# Altium PCB Sensor_PCB.PcbDoc
Units mm, origin at the board's own origin, x right, y up, seen from the top; angles counter-clockwise.
Board outline 46.6 x 38.61 mm, 2 copper layers (Top Layer, Bottom Layer), stack 1.671 mm thick; 10 components, 7 nets, 33 pads, 0 vias.
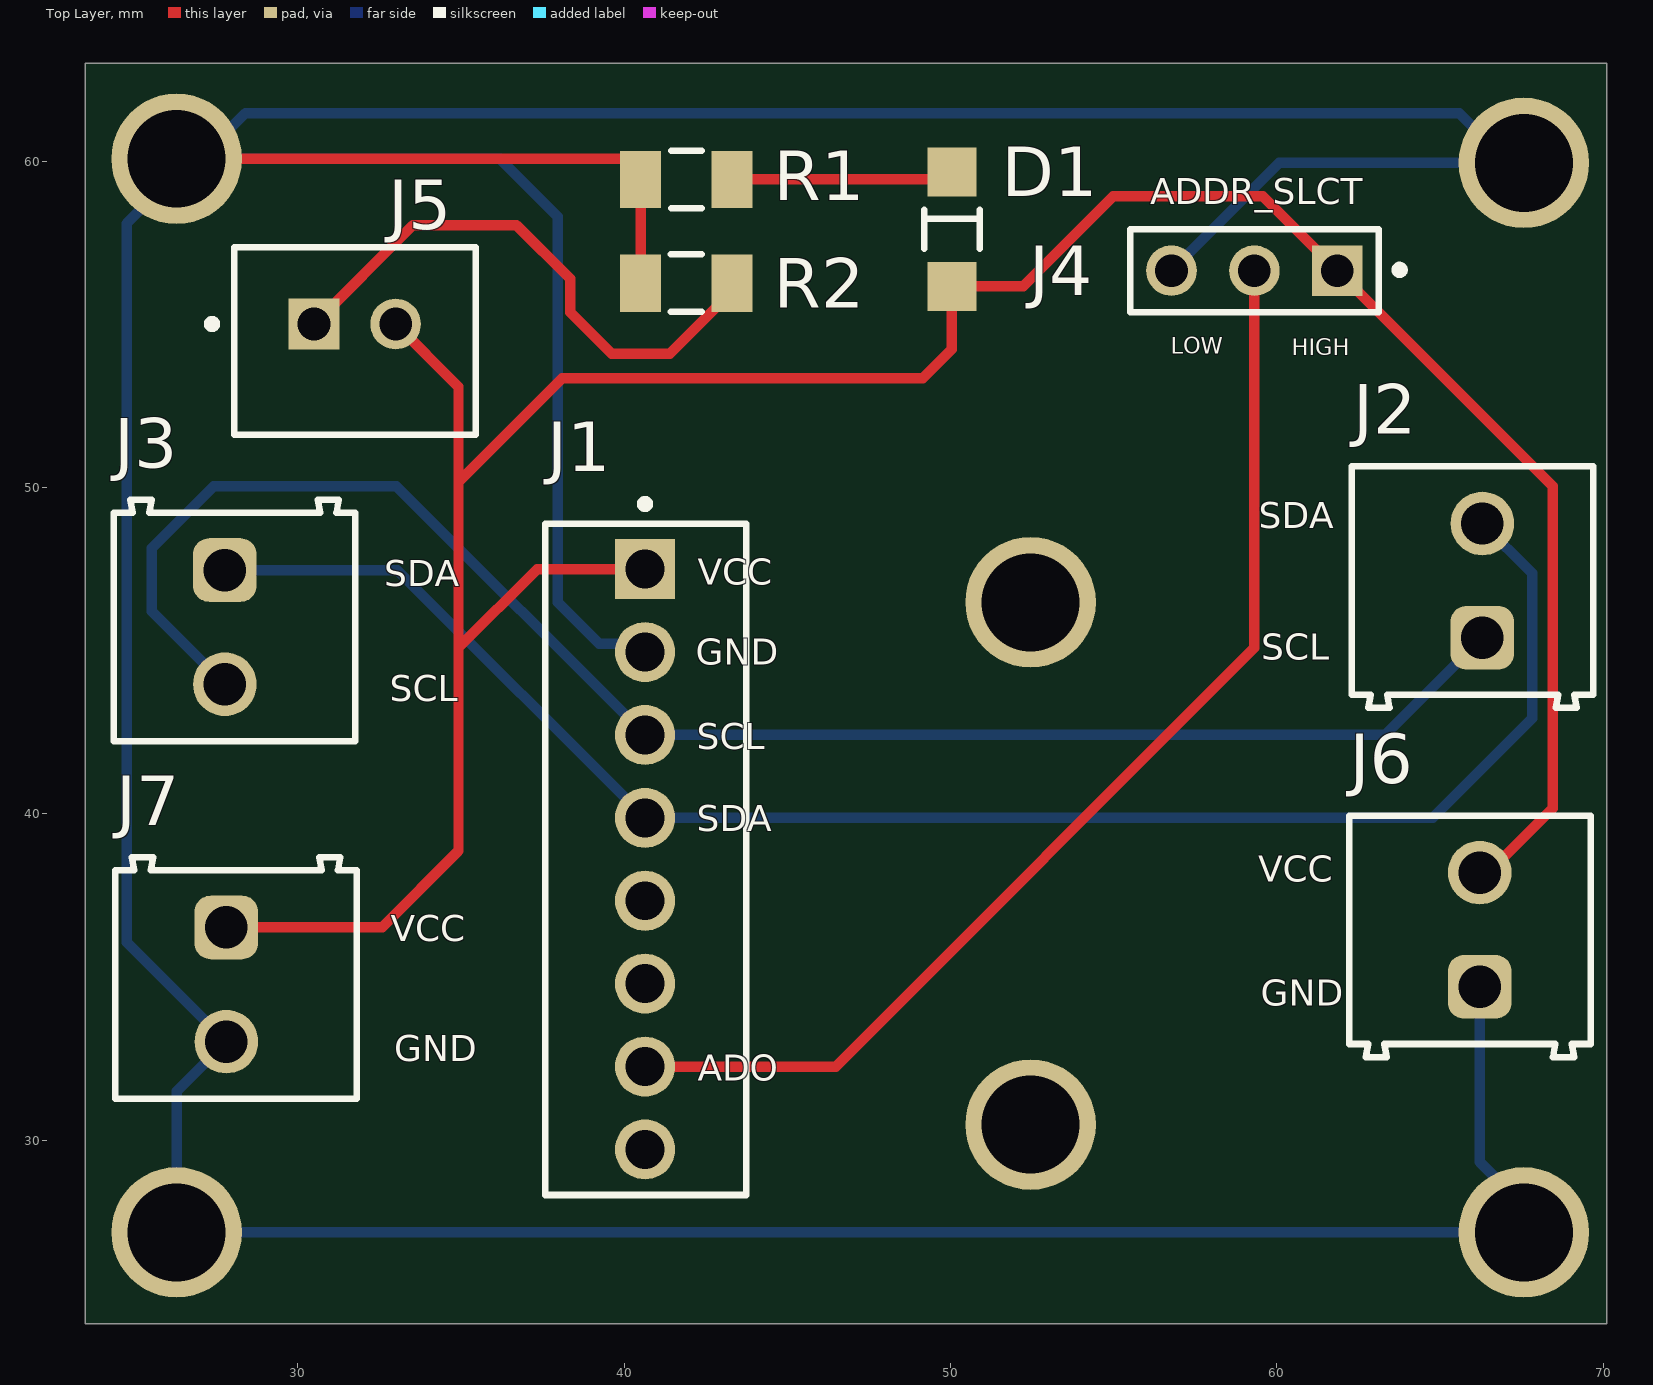
[diagram p0: Top Layer view]
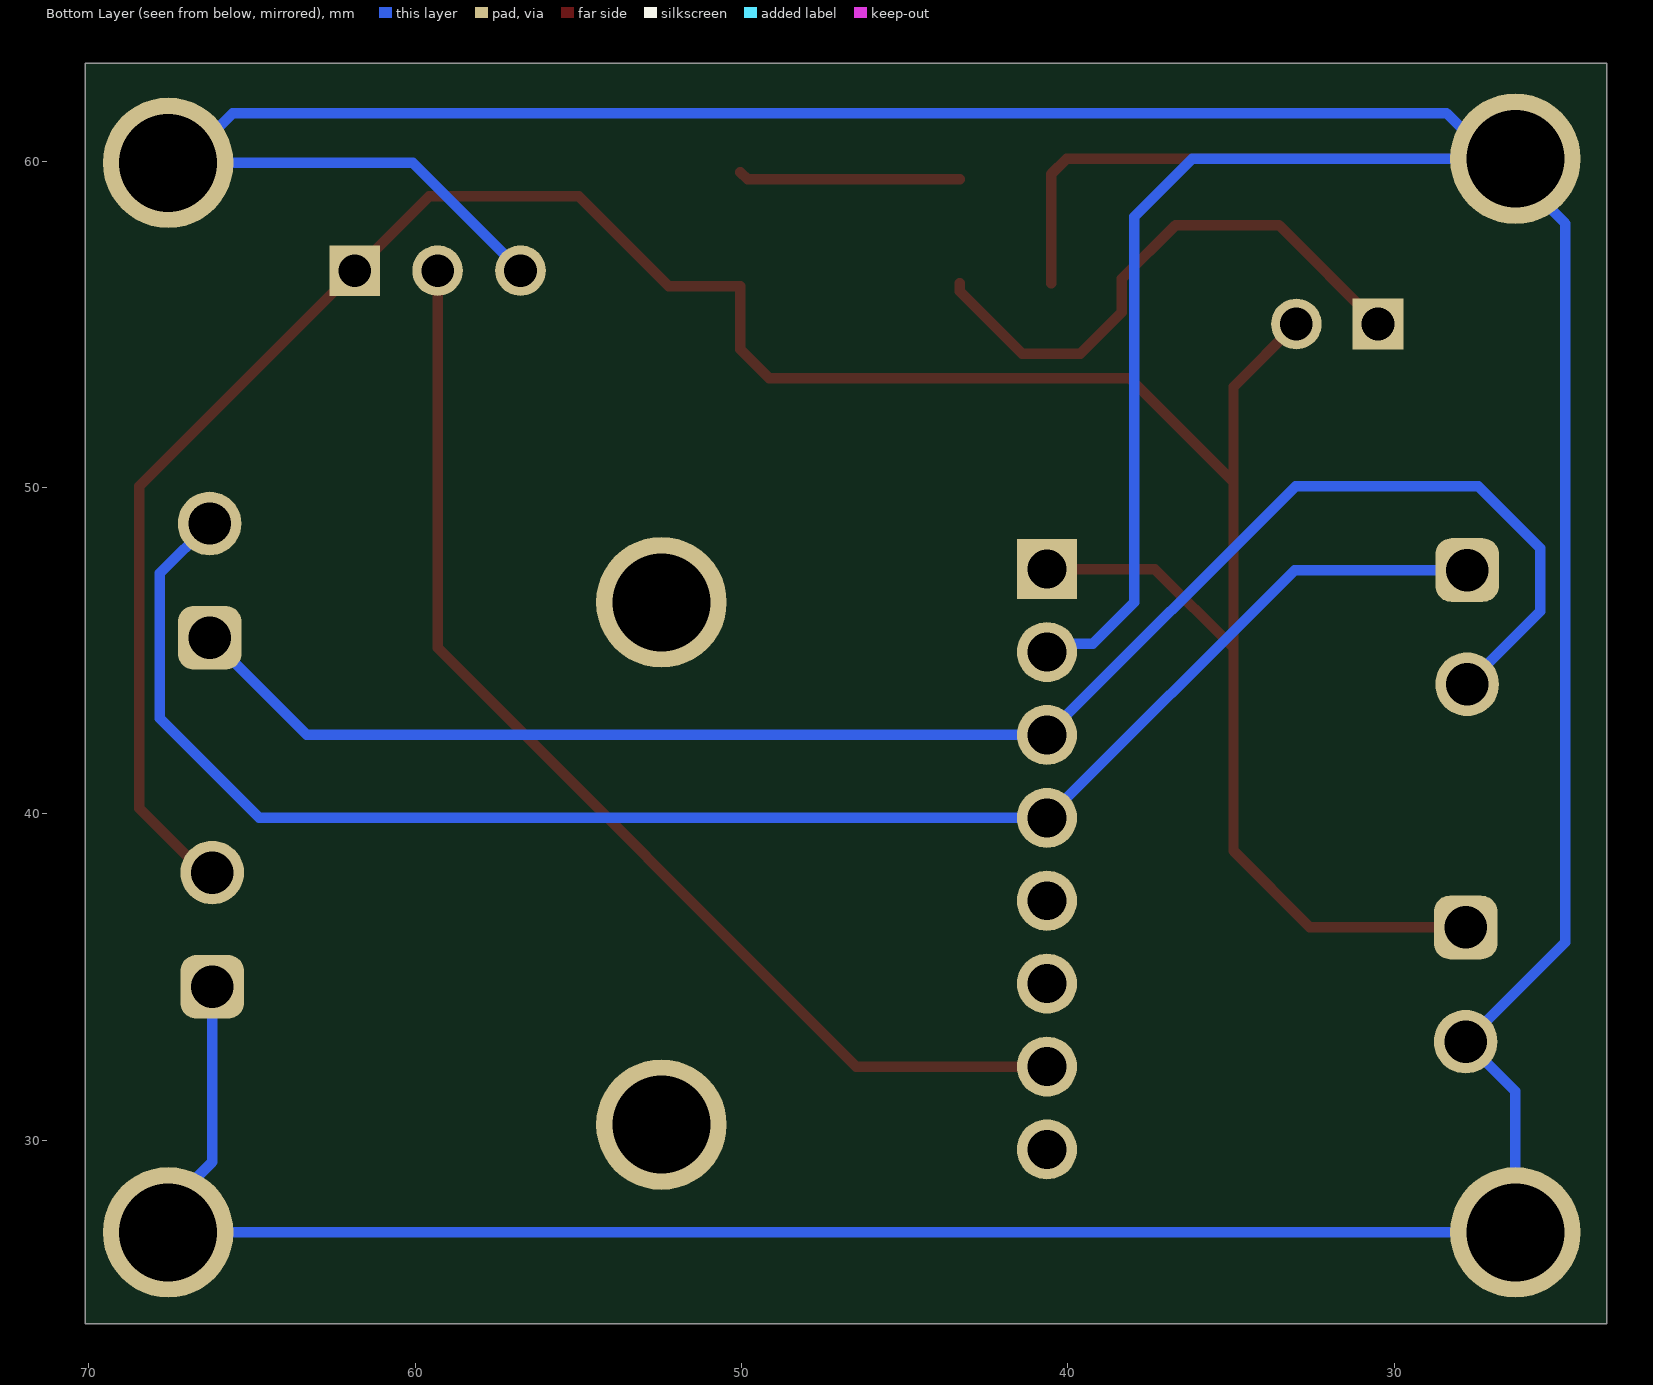
[diagram p1: Bottom Layer view, seen from below]
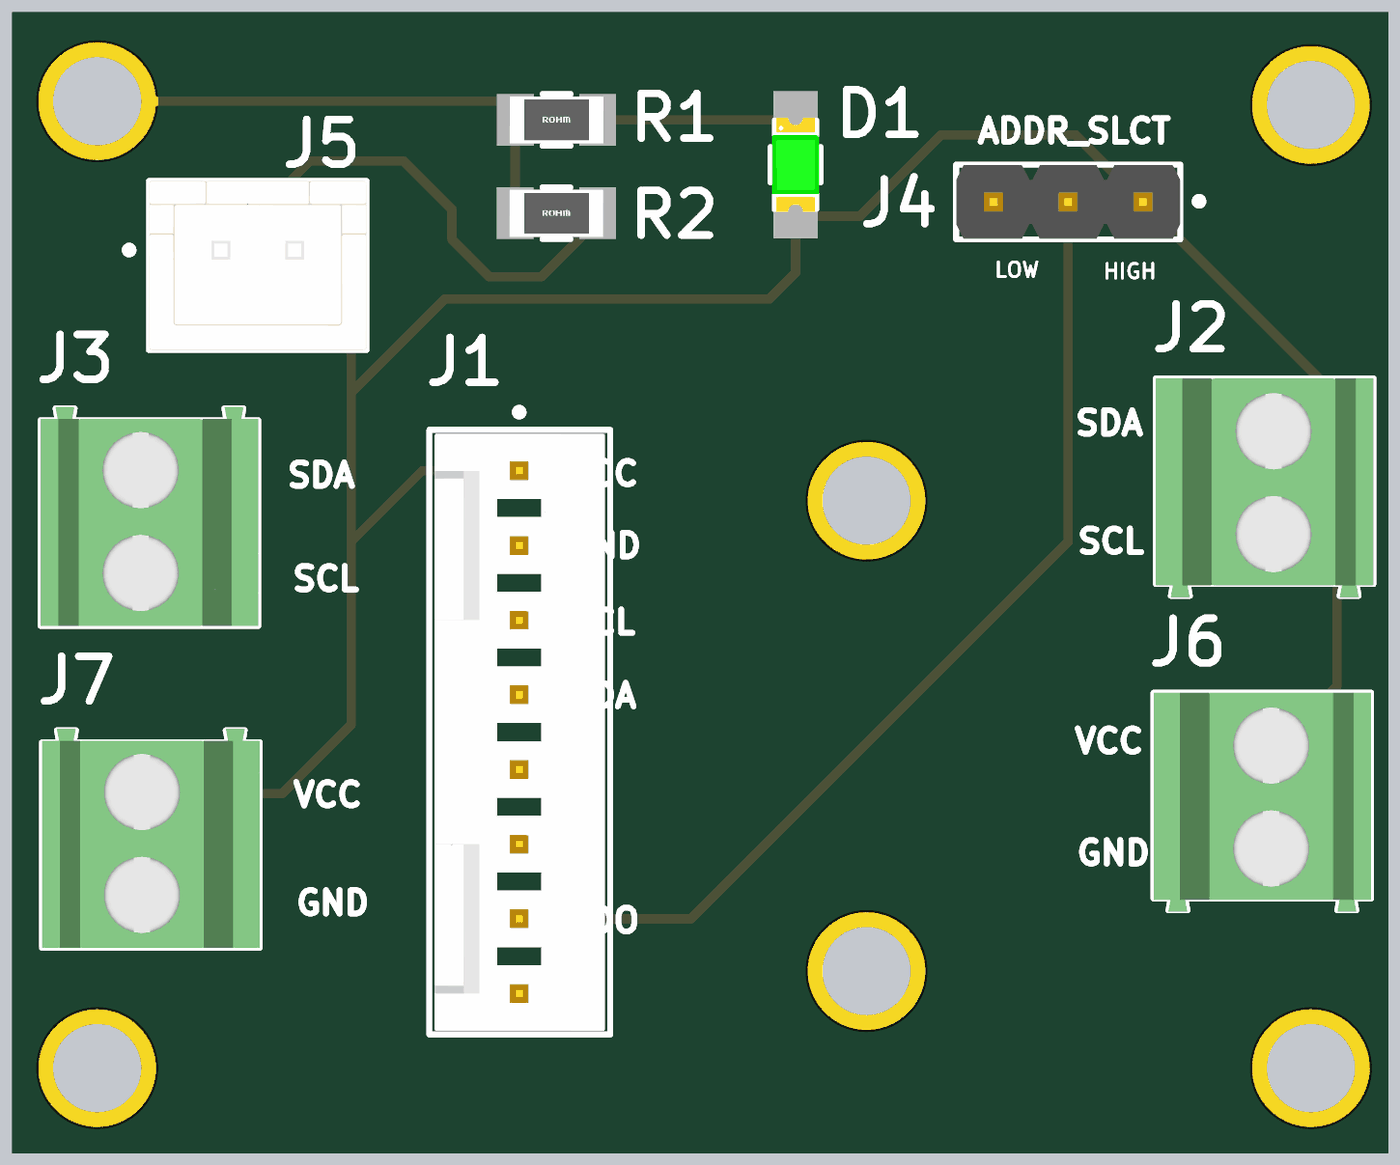
[diagram p2: 3D render of the assembled board from above, using the file's embedded part models]

## Layer stack, top to bottom
Top Solder: solder mask 0.0102, Solder Resist, Dk 3.5
Top Layer: signal copper 0.0356
Dielectric 1: dielectric 1.6, FR-4, Dk 4.8
Bottom Layer: signal copper 0.0356
Bottom Solder: solder mask 0.0102, Solder Resist, Dk 3.5

## Board outline
23.495,24.384 70.1,24.384 70.1,62.992 23.495,62.992

## Design rules (kind name [scope] priority, off if disabled: settings)
BoardOutlineClearance [All] p1: gap=0.2 ignorepadtopadclearanceinfootprint=FALSE
Clearance [All] p1: gap=0.127 ignorepadtopadclearanceinfootprint=FALSE except(0.25: Arc-Hole Track-Hole SMDPad-Hole THPad-Hole Via-Hole Fill-Hole Poly-Hole Region-Hole Text-Hole)
ComponentClearance [All] p1: gap=0.127 collisioncheckmode=3 verticalgap=0.127 showdistances=TRUE
DiffPairsRouting [All] p1: maxlimit=0.254 minlimit=0.127 mostfreqgap=0.127 toplayer_minwidth=0.127 toplayer_maxwidth=25.4 toplayer_prefwidth=0.127 bottomlayer_minwidth=0.127 bottomlayer_maxwidth=25.4 bottomlayer_prefwidth=0.127 maxuncoupledlength=12.7
Height [All] p1: minheight=0 maxheight=1816.048 prefheight=12.7
HoleSize [All] p1: absolutevalues=TRUE maxlimit=6.3 minlimit=0.3 maxpercent=80.000 minpercent=20.000
HoleToHoleClearance [All] p1: gap=0.25 allowstackedmicrovias=FALSE
MinimumAnnularRing [All] p1: minimumring=0.076
MinimumSolderMaskSliver [All] p1: minsoldermaskwidth=0
PlaneClearance [All] p1: clearance=0.127
PlaneConnect PlaneConnectPowerPads [InPadClass('PowerPads')] p1: planeconnectstyle=Direct reliefexpansion=0.508 reliefentries=4 reliefconductorwidth=0.254 reliefairgap=0.254
PlaneConnect [All] p2: pad.planeconnectstyle=Relief pad.reliefexpansion=0.3 pad.reliefentries=4 pad.reliefconductorwidth=0.127 pad.reliefairgap=0.127 via.planeconnectstyle=Direct via.reliefexpansion=0.3 via.reliefentries=4 via.reliefconductorwidth=0.127 via.reliefairgap=0.127
PolygonConnect PolygonConnectPowerPads [All vs (InPadClass('PowerPads'))] p1: connectstyle=Direct reliefconductorwidth=0.254 reliefentries=4 polygonreliefangle="90 Angle" airgapwidth=0.254
PolygonConnect [All] p2: thpad.connectstyle=Relief thpad.reliefconductorwidth=0.127 thpad.reliefentries=4 thpad.polygonreliefangle="90 Angle" thpad.airgapwidth=0.127 smdpad.connectstyle=Relief smdpad.reliefconductorwidth=0.127 smdpad.reliefentries=4 smdpad.polygonreliefangle="90 Angle" smdpad.airgapwidth=0.127 via.connectstyle=Direct via.reliefconductorwidth=0.127 via.reliefentries=4 via.polygonreliefangle="90 Angle" via.airgapwidth=0.127
RoutingVias [All] p1: holewidth=0.3 width=0.6 viastyle="Through Hole" minholewidth=0.3 minwidth=0.6 maxholewidth=0.6 maxwidth=6.6
SilkToSilkClearance [All] p1: silktosilkclearance=0
SilkToSolderMaskClearance [IsPad] p1: minsilkscreentomaskgap=0.127 clearancetoexposedcopper=TRUE
SolderMaskExpansion [All] p1: expansion=0.075 istentingtop=FALSE
Width [All] p1: maxlimit=25.4 minlimit=0.127 preferedwidth=0.127 minimp=50.000000 maximp=50.000000 favimp=50.000000
20 further rules are at their usual default settings.

## Components (designator, comment, footprint, x,y, rotation, side; value= is the part's Value field where it differs from the comment)
D1 "HSMG-C150" FP-HSMG-C150-MFG 50.038,57.912 r270 top
J1 "22-29-2081" FP-22-29-2081-MFG 40.66,38.608 r90 top
J2 "691214110002" 691214110002 65.994,47.145 r90 top
J3 "691214110002" 691214110002 28.067,45.72 r270 top
J4 "90120-0763" FP-90120-0763-MFG 59.309,56.642 r180 top
J5 "B2B-XH-A(LF)(SN)" FP-B2B-XH-A_LF_SN-MFG 31.75,54.483 r0 top
J6 "691214110002" 691214110002 65.913,36.449 r90 top
J7 "691214110002" 691214110002 28.113,34.77 r270 top
R1 "MCR18EZPF30R0" FP-MCR18-IPC_B 41.91,59.436 r0 top
R2 "MCR18EZPF30R0" FP-MCR18-IPC_B 41.906,56.261 r0 top

## Footprints (in the part's own frame and the unit in brackets; to place one, negate y for a bottom-side part, rotate by r counter-clockwise, add the part's x,y. Pads: shape width x height; smd on the part's side, far side on the other; paste and mask are expansions set on the pad)
691214110002 [mm] "3.50 mm Horizontal Entry Modular, 2p"
  rrect50% 1.95x1.95 hole 1.3: 1(-1.75,-0.3)
  round 1.95 hole 1.3: 2(1.75,-0.3)
  silkscreen extent -3.9,-3.7 3.5,3.7, body extent -3.95,-3.7 3.5,3.7, height 8.55
FP-22-29-2081-MFG [mm]
  rect 1.84x1.84 hole 1.19 paste-2539.97 mask+0: 1(8.89,0.02)
  round 1.84 hole 1.19 paste-2539.97 mask+0: 2(6.35,0.02) 3(3.81,0.02) 4(1.27,0.02) 5(-1.27,0.02) 6(-3.81,0.02) 7(-6.35,0.02) 8(-8.89,0.02)
  silkscreen extent -10.29,-3.08 11.01,3.08, body extent -10.39,-3.18 10.39,3.17, height 0.25
FP-90120-0763-MFG [mm]
  rect 1.55x1.55 hole 1 paste-2539.97 mask+0: 1(-2.54,0)
  round 1.55 hole 1 paste-2539.97 mask+0: 2(0,0) 3(2.54,0)
  silkscreen extent -4.58,-1.27 3.81,1.27, body extent -3.91,-1.37 3.91,1.37, height 0.25
FP-B2B-XH-A_LF_SN-MFG [mm]
  rect 1.55x1.55 hole 1 paste-2539.97 mask+0: 1(-1.25,0.525)
  round 1.55 hole 1 paste-2539.97 mask+0: 2(1.25,0.525)
  silkscreen extent -4.5,-2.88 3.7,2.88, body extent -3.8,-2.98 3.8,2.98, height 0.25
FP-HSMG-C150-MFG [mm]
  rect 1.5x1.5 smd paste+0 mask+0: 1(-1.75,0) 2(1.75,0)
  silkscreen extent -0.6,-0.85 0.6,0.85, body extent -2.6,-0.95 2.6,0.95, height 0.25
FP-MCR18-IPC_B [mm]
  rect 1.256x1.758 smd paste+0 mask+0: 1(-1.401,0) 2(1.401,0)
  silkscreen extent -0.47,-0.88 0.47,0.88, body extent -2.28,-1.13 2.28,1.13, height 0.25

## Part data
D1: library part CMP-2000-05061-2, "LED GREEN DIFFUSED 1206 SMD", Colour=Green, Forward Current=20mA, Forward Voltage=2.2V, Manufacturer=Broadcom, Max Junction Temp=+95°C, Power Dissipation=65mW, Reverse Voltage=5V, Temperature="-40°C to +85°C", Temperature Range High=+85°C, Temperature Range Low=-40°C, Automotive=No, Category=Diode, ComponentLink2Description=Datasheet, ComponentLink2URL=https://docs.broadcom.com/docs/AV02-0551EN, Device Class L1=Optoelectronics, Device Class L2=LEDs, Device Class L3=unset, Digikey Description="LED GREEN DIFFUSED 1206 SMD", Height=1.2mm, Ipc Land Pattern Name=DIOCP320160X55, Lead Free=Yes, Led Orientation="Top View", Luminous Intensity=15mcd, Manufacturer Part Number=HSMG-C150, Mouser Description="LED Uni-Color Green 570nm 2-Pin Chip LED T/R", Octopart=https://octopart.com/hsmg-c150-broadcom-71131304, Package=HSMG-C150, Peak Emmision Wavelength=570nm, RoHS=TRUE, Viewing Angle=170°, Wavelength=572nm
J1: library part CMP-00257-00277737-1, "22-29-2081 KK® 254 Wire-to-Board Header, Vertical, with Friction Lock, 8 Circuits, Gold (Au) Plating", Color=White, Contact Resistance=10mΩ, Current Rating=4A, Flammability Rating="UL94 V-0", Insulation Resistance=50GΩ, Max Operating Temperature=75°C, Min Operating Temperature=-40°C, Voltage Rating=250V, Contact Material=Brass, Contact Plating=Gold, Gender=Male, Glow Wire Compliant=Non-compliant, Halogen Free="Low Halogen", Height=11.42mm, Housing Material=Nylon, Lead Free="Lead Free", Lead Pitch=2.54mm, Mount="Through Hole", NexarPartId=277737, Number of Circuits=8, Number of Contacts=8, Number of Pins=8, Number of Positions=8, Number of Rows=1, Orientation=Vertical, Packaging=Bulk, Pitch=2.54mm, Radiation Hardening=No, REACH SVHC=Unknown, RoHS=Compliant, Schedule B=8536694040, Termination="Through Hole", Voltage Rating (DC)=250V
J2 J3 J6 J7: library part CMP-1502-02464-2, Color="Blue, Green", Current=10A, Max Operating Temperature=105°C, Min Operating Temperature=-40°C, Voltage=300V, Contact Material=Brass, Contact Plating="Brass, Tin", Current Rating=10A, Height=8.7mm, Housing Material=Nylon, Lead Pitch=3.5mm, Length=7.4mm, Mount="Through Hole", NexarPartId=18818288, Number of Contacts=2, Number of Levels=1, Number of Pins=2, Number of Positions Per Level=2, Number of Rows=1, Packaging=Box, Pitch=3.5052mm, Plating="Brass, Steel", REACH SVHC=Unknown, RoHS=Compliant, Stripping Length=-6mm, Termination=Screw, Voltage Rating=300V, Width=7.9mm, Wire Gauge (Max)=24AWG, Wire Gauge (Min)=16AWG, Wire/Cable Gauge=24AWG
J4: library part CMP-04776-000084-1, "CONN HEADER VERT 3POS 2.54MM", Current Rating=3A, Manufacturer=Molex, Temperature="-55°C to +125°C", Temperature Range High=+125°C, Temperature Range Low=-55°C, Voltage Rating=350V, Automotive=No, Category=Conn, ComponentLink2Description=Datasheet, ComponentLink2URL=https://www.molex.com/webdocs/datasheets/pdf/en-us/0901200763_PCB_HEADERS.pdf, Conn Gender=Male, Conn Orientation=Vertical, Contact Material=Gold,Nickel, Device Class L1=Connectors, Device Class L2="Headers and Wire Housings", Device Class L3=unset, Digikey Description="CONN HEADER VERT 3POS 2.54MM", Footprint Url=https://www.molex.com/pdm_docs/sd/901200763_sd.pdf, Height=5.8mm, Lead Free=Yes, Manufacturer Part Number=90120-0763, Mouser Description="Board-To-Board Connector, C-Grid III 90120 Series, Through Hole, Header, 3, 2.54 mm", Number of Contacts=3, Number of Rows=1, Octopart=https://octopart.com/90120-0763-molex-655433, Package=90120-0763, Pitch=2.54mm, RoHS=TRUE
J5: library part CMP-2000-05888-3, "CONN HEADER VERT 2POS 2.5MM", Color=Natural, Contact Resistance=20mR, Current Rating=3A, Housing Color=White, Insulation Resistance=1GR, Max Operating Temperature=85°C, Max Voltage Rating (AC)=250V, Min Operating Temperature=-25°C, Connector Type="Male Pin", Contact Material=Brass, Contact Plating=Tin, Contact Type="Male Pin", Depth=5.75mm, Fastening Type=Detent, Housing Material=Polyamide, Lead Free="Lead Free", Lead Pitch=2.5mm, Length=7.4mm, Max Current Rating=3A, Max Voltage Rating (DC)=250V, Mount="Through Hole", Number of Contacts=2, Number of Positions=2, Number of Rows=1, Orientation=Straight, Packaging=Bulk, Pitch=2.5mm, REACH SVHC="No SVHC", Series=XH, Termination=Solder, Voltage Rating=250V, Voltage Rating (AC)=250V, Wire/Cable Gauge=22AWG
R1 R2: library part CMP-08839-012195-1, "Thick Film Chip Resistor, 1206, 30Ω, 1%, 100ppm/°C, 0.25W, 200V", Case Code (Imperial)=1206, Case Code (Metric)=3216, Max Power Dissipation=250mW, Package Quantity=5000, Resistance=330, Resistor Type="Thick Film", Temperature Coefficient=100ppm/°C, Tolerance=1%, Voltage Rating (DC)=200V, Case/Package=1206, Features="Automotive AEC-Q200", Height=0.026inch, Lead Free="Lead Free", Length=0.126inch, Number of Terminations=2, Packaging="Tape and Reel", RoHS Compliant=Yes, Series=MCR18, Width=0.063inch

## Free pads (board coordinates)
  round 4 hole 3: 10(26.289,60.071) 11(26.289,27.178) 12(67.564,59.944) 13(67.564,27.178) 14(52.451,46.482) 15(52.451,30.48)

## Nets (pads, with @x,y where several pads share a name; then routed paths per layer and width w, separated by ;. In a path a pad name is that pad's centre, name@x,y a point inside that pad or via, vN(x,y) a via of type N, cw(c..) or ccw(c..) an arc to the next point about the centre after c; other vN are vias at no path point)
+5V: D1.2 J1.1 J4.1 J5.2 J6.2 J7.1 | length 86.6
  Top Layer w0.32: J7.1 32.583,36.52 34.925,38.862 34.925,45.085 ; J5.2 34.925,53.083 34.925,50.165 ; J1.1 37.338,47.498 34.925,45.085 ; J6.2 66.473,38.199 68.453,40.179 68.453,50.038 J4.1 59.563,58.928 54.991,58.928 52.225,56.162 D1.2 50.038,54.229 49.149,53.34 38.1,53.34 34.925,50.165 ; 34.925,45.085 34.925,50.165
ADO: J1.7 J4.2 | length 35.5
  Top Layer w0.32: J1.7 46.482,32.258 59.309,45.085 J4.2
GND: J1.2 J4.3 J6.1 J7.2 pad.10 pad.11 pad.12 pad.13 R1.1 R2.1 | length 183.5
  Top Layer w0.32: pad.10 40.041,60.071 40.509,59.603 R1.1 40.505,59.432 R2.1
  Bottom Layer w0.32: J1.2 40.383,45.215 39.24,45.215 37.973,46.482 37.973,58.293 36.195,60.071 pad.10@27.002,60.071 ; J4.3 60.071,59.944 pad.12@67.105,59.944 ; J6.1 66.213,29.334 67.564,27.983 pad.13 pad.11 26.289,31.496 J7.2 24.765,36.068 24.765,58.088 26.289,59.612 pad.10 pad.10@27.002,60.071 ; pad.12 pad.12@67.105,59.944 ; pad.10@27.002,60.071 28.399,61.468 65.581,61.468 pad.12@67.105,59.944
NetD1_1: D1.1 R1.2 | length 6.8
  Top Layer w0.32: R1.2 49.812,59.436 D1.1
NetJ5_1: J5.1 R2.2 | length 17.3
  Top Layer w0.32: J5.1 33.531,58.039 36.703,58.039 38.354,56.388 38.354,55.372 39.624,54.102 41.399,54.102 43.307,56.01 R2.2
SCL: J1.3 J2.1 J3.2 | length 51
  Bottom Layer w0.32: J3.2 25.527,46.21 25.527,48.133 27.432,50.038 33.02,50.038 J1.3 63.317,42.418 J2.1
SDA: J1.4 J2.2 J3.1 | length 51.1
  Bottom Layer w0.32: J3.1 33.048,47.47 J1.4 64.77,39.878 67.818,42.926 67.818,47.371 J2.2
pads on no net: J1.5 J1.6 J1.8

## Silkscreen, mask and mechanical layers (free items; w line width, h text height)
Top Overlay:
  text "ADDR_SLCT" at 56.125,58.683 h0.8
  text "LOW" at 56.75,54.1 h0.5
  text "HIGH" at 60.45,54.05 h0.5
  text "SDA" at 59.45,48.75 h0.8
  text "VCC" at 42.25,47.025 h0.8
  text "SDA" at 32.65,46.975 h0.8
  text "SCL" at 59.525,44.725 h0.8
  text "GND" at 42.2,44.575 h0.8
  text "SCL" at 32.825,43.45 h0.8
  text "SCL" at 42.225,41.975 h0.8
  text "SDA" at 42.225,39.475 h0.8
  text "VCC" at 59.425,37.925 h0.8
  text "VCC" at 32.85,36.1 h0.8
  text "GND" at 59.5,34.125 h0.8
  text "GND" at 32.95,32.425 h0.8
  text "ADO" at 42.25,31.825 h0.8
Board:
  lines w0.2: 23.5,24.375 23.5,63 70.075,63 70.1,62.975 70.1,24.375 23.5,24.375